# Altium PCB diapers.PcbDoc
Units mm, origin at the board's own origin, x right, y up, seen from the top; angles counter-clockwise.
Board outline 25.63 x 32.28 mm, 2 copper layers (Top Layer, Bottom Layer); 37 components, 22 nets, 124 pads, 35 vias.
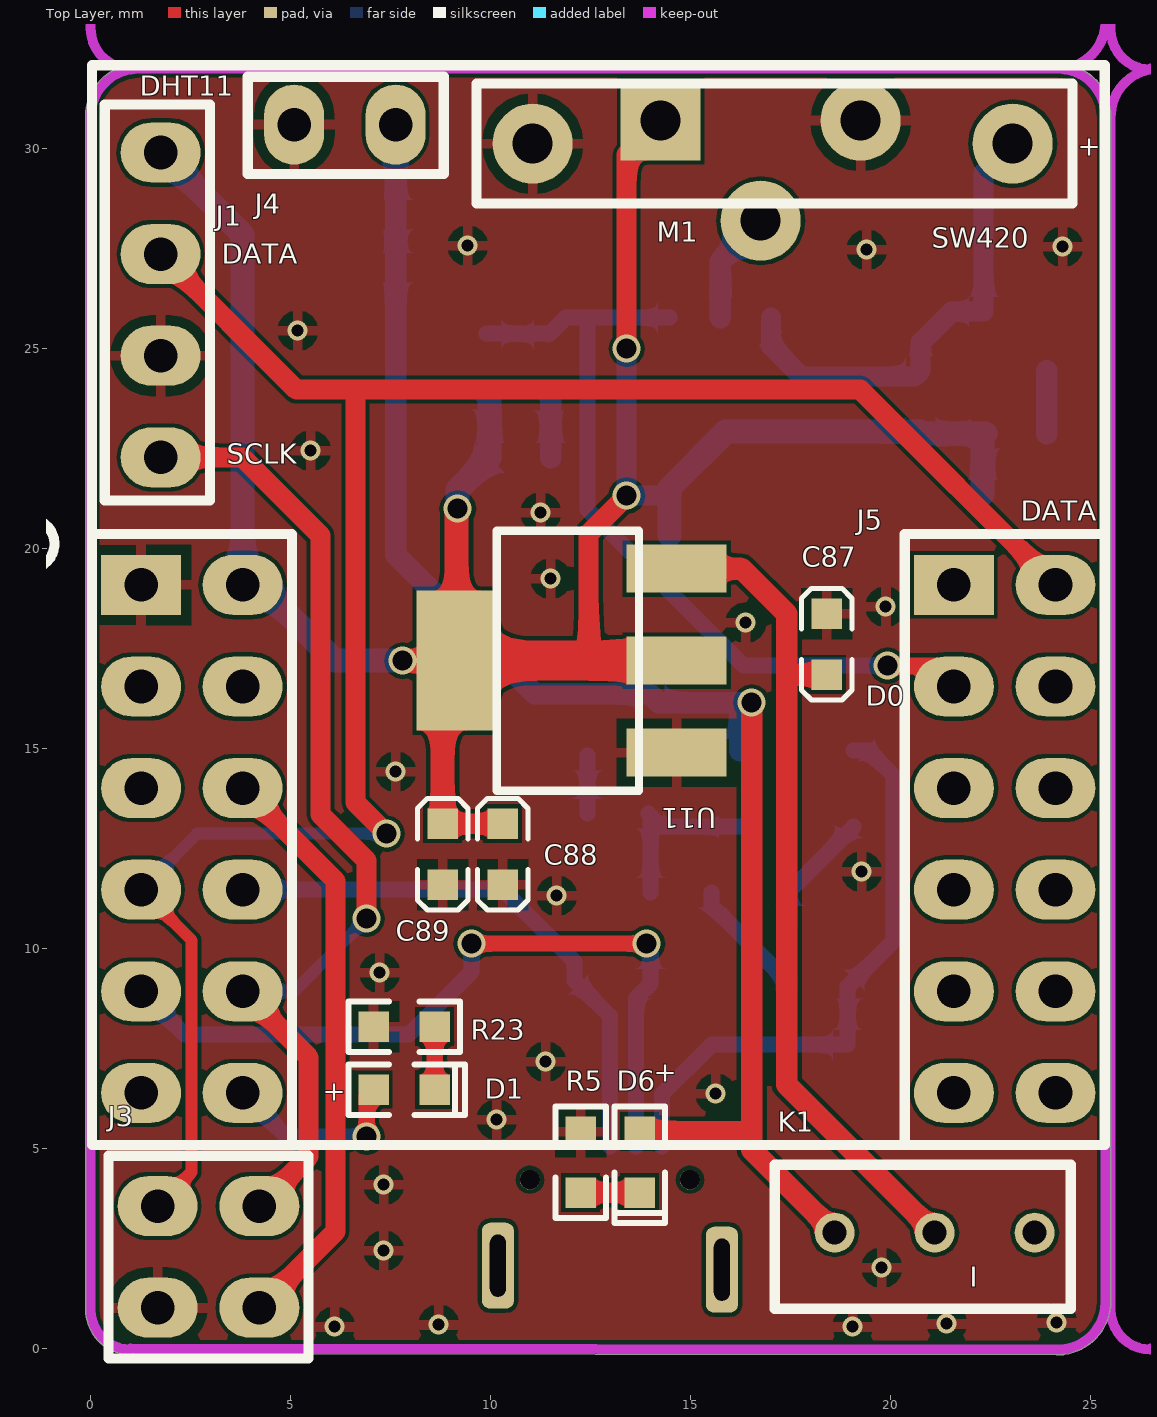
[diagram p0: Top Layer view]
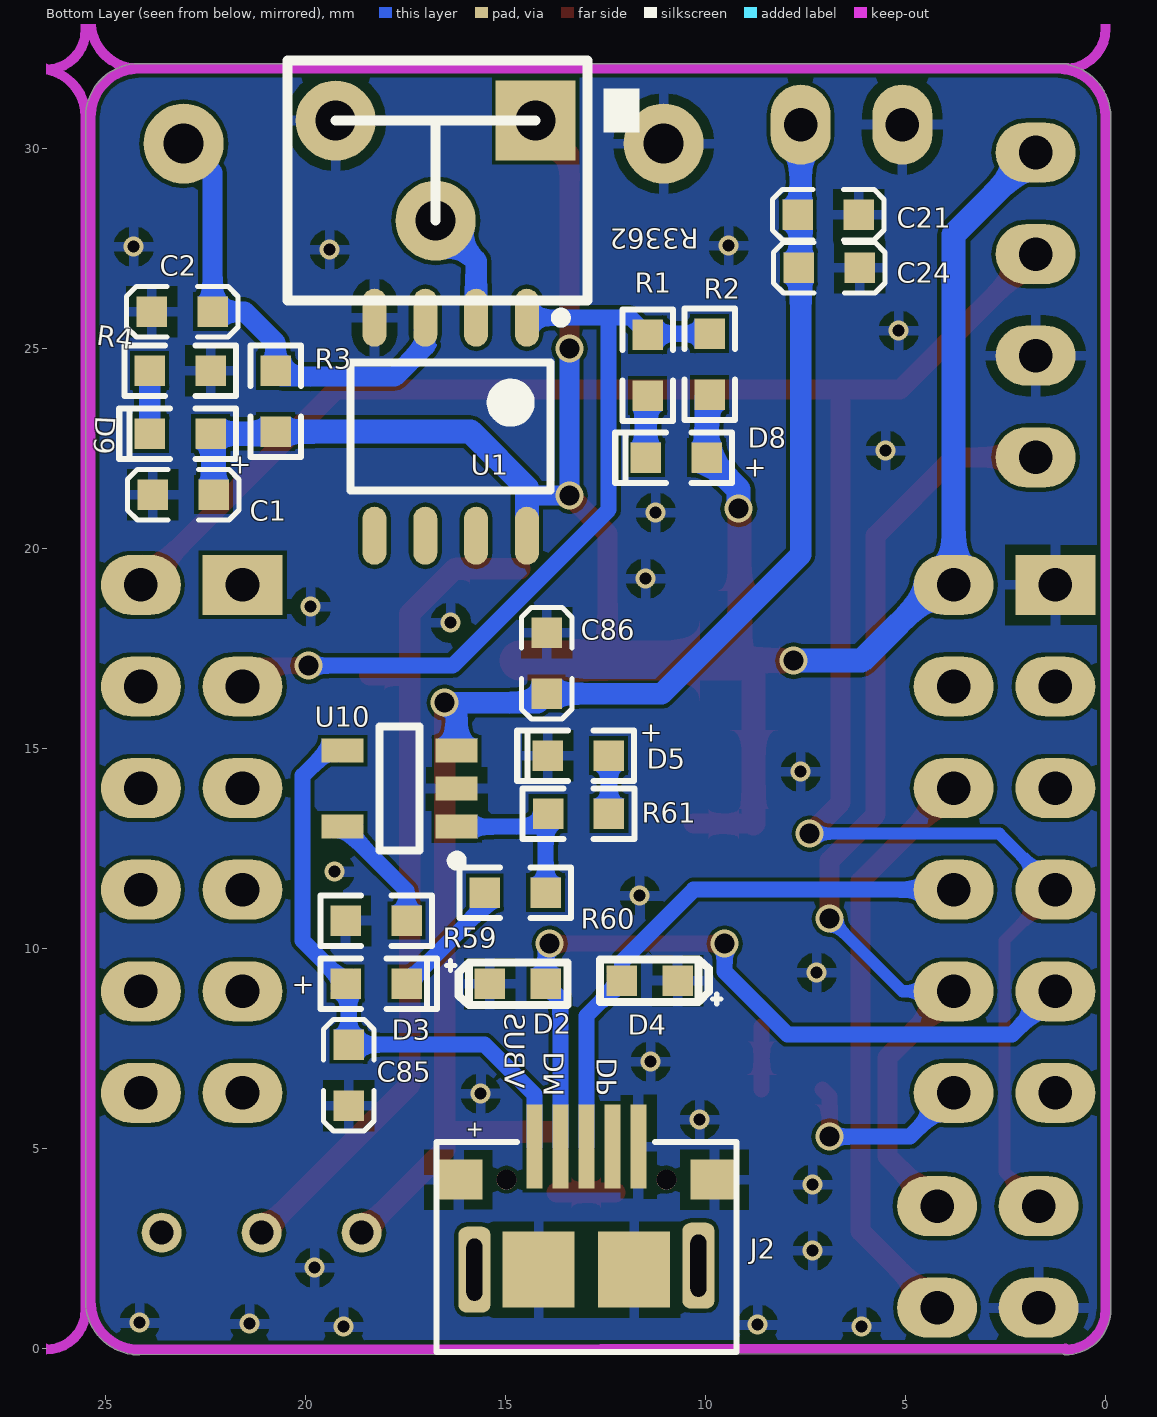
[diagram p1: Bottom Layer view, seen from below]
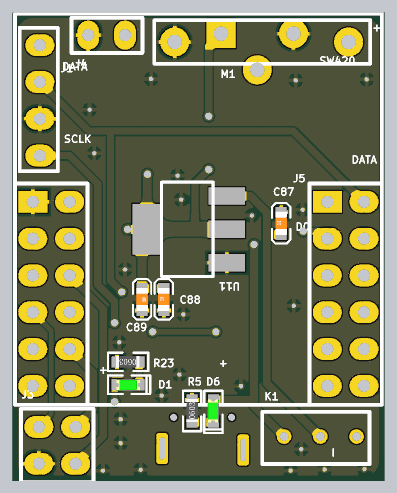
[diagram p2: 3D render of the assembled board from above, using the file's embedded part models]
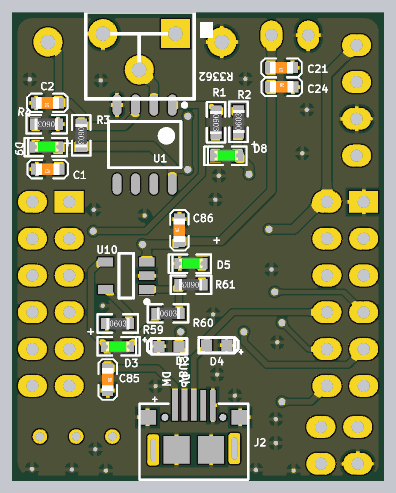
[diagram p3: 3D render of the assembled board from below, using the file's embedded part models]

## Layer stack, top to bottom
Top Solder: solder mask 0.0102, Solder Resist, Dk 3.5
Top Layer: signal copper 0.0356
Dielectric 1: dielectric 0.32, FR-4, Dk 4.8
Bottom Layer: signal copper 0.0356
Bottom Solder: solder mask 0.0102, Solder Resist, Dk 3.5

## Board outline
-0.125,0.975 ccw(c1,0.975) 1,-0.15 ccw(c1,-0.025) 1.075,-0.125 24.146,-0.147 ccw(c24.175,-0.025) 24.175,-0.15 ccw(c24.175,1.175) 24.268,-0.147 24.3,-0.147 ccw(c24.3,-0.022) 24.342,-0.14 ccw(c24.175,1.175) 25.5,1.175 25.5,30.775 ccw(c25.375,30.775) 25.5,30.788 25.5,30.787 ccw(c25.375,30.8) 25.5,30.8 ccw(c24.175,30.8) 24.175,32.125 1,32.125 ccw(c1,32) 0.918,32.095 ccw(c1.2,30.8) -0.125,30.8 -0.125,1 ccw(c0,1) -0.125,0.987 ccw(c0,0.975)

## Design rules (kind name [scope] priority, off if disabled: settings)
Clearance [All] p1: gap=0.1
PolygonConnect [All] p1: connectstyle=Relief reliefconductorwidth=0.254 reliefentries=4 polygonreliefangle="90 Angle" airgapwidth=0.254
RoutingVias [All] p1: holewidth=0.3 width=0.5 viastyle="Through Hole" minholewidth=0.3 minwidth=0.5 maxholewidth=0.5 maxwidth=0.7
SolderMaskExpansion [All] p1: expansion=0.102
Width [All] p1: maxlimit=10 minlimit=0.1 preferedwidth=0.5
30 further rules are at their usual default settings.

## Components (designator, comment, footprint, x,y, rotation, side; value= is the part's Value field where it differs from the comment)
C1 "104K50V" C0603 22.301,21.35 r0 bottom
C2 "104K50V" C0603 22.326,25.925 r0 bottom
C21 "104K50V" C0603 6.175,28.35 r0 bottom
C24 "106K50V" C0603 7.674,27.025 r180 bottom
C85 "475K16V" C0603 18.925,7.599 r270 bottom
C86 "106K50V" C0603 13.975,16.376 r90 bottom
C87 "104K50V" C0603 18.4,16.851 r90 top
C88 "106K50V" C0603 10.3,11.601 r90 top
C89 "104K50V" C0603 8.8,13.125 r270 top
D1 "LED0603G" D-LED0603G 7.075,6.475 r0 top
D2 "ESDA_TR1/0603" HS_0603D 14.698,9.125 r180 bottom
D3 "LED0603G" D-LED0603G 19,9.125 r180 bottom
D4 "ESDA_TR1/0603" HS_0603D 11.4,9.2 r0 bottom
D5 "LED0603G" D-LED0603G 12.425,14.825 r0 bottom
D6 "LED0603G" D-LED0603G 13.725,5.425 r270 top
D8 "LED0603G" D-LED0603G 9.975,22.275 r0 bottom
D9 "LED0603G" D-LED0603G 22.376,22.875 r0 bottom
J1 "J-D2.45-1*4" D2.54-1*4P 1.75,29.905 r270 top
J2 "USB-MINI-SOCKET" "MICRO-USB - 5.9" 14.281,5.05 r180 bottom
J3 "J-D2.54-2*2" D2.54-2*2P 1.675,1.025 r90 top
J4 "J-D2.54-1*2" D2.54-1*2P 7.625,30.6 r180 top
J5 "CC2540" CC2540 0.03,5.095 r0 top locked
K1 "SS-12D00" SS-12D00 23.6,2.9 r180 top
M1 "SW420" SW420 23.05,30.125 r180 top
R1 "1KF" R0603 11.45,25.349 r270 bottom
R2 "10KF" R0603 9.9,23.851 r90 bottom
R3 "10KF" R0603 20.75,24.449 r270 bottom
R4 "1KF" R0603 22.376,24.45 r0 bottom
R5 "1KF" R0603 12.25,3.901 r90 top
R23 "1KF" R0603 8.599,8.05 r180 top
R59 "R0603-15KF" R0603 18.999,10.7 r180 bottom
R60 "470RF" R0603 15.524,11.4 r180 bottom
R61 "470RF" R0603 12.418,13.375 r0 bottom
R3362 "10k" R3326P 12.95,32.2 r0 bottom
U1 "LM393-DR" LM393 16.375,23.05 r270 bottom
U10 "MCP73831" SOT23-5N 17.65,14 r0 bottom
U11 "AMS1117_3.3V" SOT-223 14.65,17.2 r90 top

## Footprints (in the part's own frame and the unit in brackets; to place one, negate y for a bottom-side part, rotate by r counter-clockwise, add the part's x,y. Pads: shape width x height; smd on the part's side, far side on the other; paste and mask are expansions set on the pad)
C0603 [mil]
  rect 30x30 smd: 1(0,0) 2(60,0)
  silkscreen extent -25,-25 85,25, body extent -1,-15 61,16, height 12
CC2540 [mm]
  rect 2x1.5 hole 0.838: 1(1.23,14) 13(21.55,14)
  oval 2x1.5 hole 0.838: 2(3.77,14) 3(1.23,11.46) 4(3.77,11.46) 5(1.23,8.92) 6(3.77,8.92) 7(1.23,6.38) 8(3.77,6.38) 9(1.23,3.84) 10(3.77,3.84) 11(1.23,1.3) 12(3.77,1.3) 14(24.09,14) 15(21.55,11.46) 16(24.09,11.46) 17(21.55,8.92) 18(24.09,8.92) 19(21.55,6.38) 20(24.09,6.38) 21(21.55,3.84) 22(24.09,3.84) 23(21.55,1.3) 24(24.09,1.3)
  silkscreen extent -2.19,0 25.32,26.99, body extent 0,0 25.4,15.27, height 10
D2.54-1*2P [mm]
  oval 1.5x2 hole 0.838: 1(0,0) 2(2.54,0)
  silkscreen extent -1.2,-1.2 3.7,1.23, body extent -1.1,-1.3 3.6,1.24, height 10
D2.54-1*4P [mm] "Bluetooth"
  oval 1.5x2 hole 0.838: 1(0,0) 2(2.54,0) 3(5.08,0) 4(7.62,0)
  silkscreen extent -1.2,-1.4 8.7,1.23, body extent -1.1,-1.4 8.7,1.23, height 10
D2.54-2*2P [mm] "DUAL_ROW_Pin_R2.54-5P"
  oval 1.5x2 hole 0.838: 1(0,0) 2(0,-2.54) 3(2.54,0) 4(2.54,-2.54)
  silkscreen extent -1.27,-3.77 3.8,1.23, body extent -1.27,-3.82 3.8,1.26, height 10
D-LED0603G [mil]
  rect 30x30 smd: 1(0,0) 2(60,0)
  silkscreen extent -25,-25 90,25, body extent -2,-16 62,15, height 24
HS_0603D [mil]
  rect 30x30 smd: 1(-27.5,0) 2(27.5,0)
  silkscreen extent -70,-21 49,23
LM393 [mm] "SOP, 8-Leads, Body 4.90x3.90mm, Pitch 1.27mm, IPC Medium Density"
  oval 1.45x0.6 smd: 1(-2.725,1.905) 2(-2.725,0.635) 3(-2.725,-0.635) 4(-2.725,-1.905) 5(2.725,-1.905) 6(2.725,-0.635) 7(2.725,0.635) 8(2.725,1.905)
  silkscreen extent -2.85,-2.5 1.6,2.88, body extent -2,-2.5 2,2.5, height 1.75
"MICRO-USB - 5.9" [mm]
  rrect50% 0.8x2.15 hole 0.4 slot 1.55 at 90 deg: 0(-1.5,-3.075) 0(4.1,-2.975)
  rect 0.4x2.1 smd: 1(0,0) 2(0.65,0) 3(1.3,0) 4(1.95,0) 5(2.6,0)
  rect 1.2x1 smd: 6(-1.9,-0.825) 7(4.5,-0.825)
  rect 1.8x1.9 smd: 8(0.106,-3.075) 9(2.493,-3.075)
  round 0.5 hole 0.5 unplated: ""(-0.7,-0.825) ""(3.3,-0.825)
  silkscreen extent -2.45,-5.13 5.05,0.12
R0603 [mil]
  rect 30x30 smd: 1(0,0) 2(60,0)
  silkscreen extent -25,-25 85,25, body extent 0,-16 62,15, height 18
R3326P [mm] "电位器精密可调电阻"
  rect 2x2 hole 1: 1(1.3,1.5)
  round 2 hole 1: 2(3.8,4) 3(6.3,1.5)
  silkscreen extent -1.3,0 7.5,6
SOT23-5N [mm] "SOT23, 5-Leads, Body 2.90x2.70mm, Pitch 0.95mm, IPC Medium Density"
  rect 1.05x0.6 smd: 1(-1.425,0.95) 2(-1.425,0) 3(-1.425,-0.95) 4(1.425,-0.95) 5(1.425,0.95)
  silkscreen extent -1.55,-1.55 0.5,1.92, body extent -0.9,-1.55 0.9,1.55, height 1.45
SOT-223 [mm]
  rect 1.2x2.5 smd: 1(-2.3,0) 2(0,0) 3(2.3,0)
  rect 3.5x2 smd: 2(0,5.5)
  silkscreen extent -3.25,0.94 3.25,4.5
SS-12D00 [mm] "SS-12D00(1P2T) 立式 柄高5MM"
  round 1 hole 0.6: 1(0,0) 2(2.5,0) 3(5,0)
  silkscreen extent -0.9,-1.7 6.5,1.9
SW420 [mm] "常闭型 振动开关SW-420 高灵敏震动开关2708全方位感应传感器"
  round 2 hole 1: 1(0,0) 2(12,0)
  silkscreen extent -1.5,-1.5 13.4,1.5

## Part data
C1 C2 C21 C87 C89: library part C0603X7R-104K50V, "贴片电容-陶瓷"
C24 C86 C88: library part C0603X7R-106K50V, "贴片电容-陶瓷"
C85: library part C0603X7R-475K16V, "贴片电容-陶瓷"
D1 D3 D5 D6 D8 D9: library part DLED-0603-G, "贴片二极管-LED"
D2 D4: library part "D Zener", "Zener Diode"
J1: library part J-D2.54-1*4单排排母
J2: library part J-USB-MINI-SOCKET, "USB-A卧式插座"
J3: library part J-D2.54-2*2双排, "双排排针-直针"
J4: library part J-D2.54-1*2单排
J5: "蓝牙主控模块的接口"
K1: library part "SS-12D00(1P2T) 立式 柄高5MM"
M1: "长闭震动开关"
R1 R4 R5 R23: library part R0603-1KF, "贴片电阻-通用"
R2 R3: library part R0603-10KF, "贴片电阻-通用"
R59: "贴片电容-通用"
R60 R61: library part R0603-470RF, "贴片电阻-通用"
R3362: library part R3362-10K, "电位器精密可调电阻"
U1: "双路比较器"
U10: "charge IC"
U11: library part AMS1117-3.3V

## Via types
v1: diameter 0.5, hole 0.3, Top Layer to Bottom Layer, tented both sides, 24 vias
v2: diameter 0.7, hole 0.5, Top Layer to Bottom Layer, tented both sides, 11 vias

## Nets (pads, with @x,y where several pads share a name; then routed paths per layer and width w, separated by ;. In a path a pad name is that pad's centre, name@x,y a point inside that pad or via, vN(x,y) a via of type N, cw(c..) or ccw(c..) an arc to the next point about the centre after c; other vN are vias at no path point)
+3.3V: C1.1 C88.2 C89.1 D8.1 D9.1 J1.1 J5.2 R2.1 R3.2 R3362.1 U1.8 U11.2 | length 62.7
  Top Layer w0.5: C89.1 C88.2 ; 12.45,17.2 12.45,20.375 v2(13.4,21.325) ; v2(13.4,25) 13.4,29.85 R3362.1
  Top Layer w0.6: v2(7.8,17.2) U11.2@9.15,17.2 ; C89.1 8.8,16.85 U11.2@9.15,17.2 ; v2(9.175,21) 9.15,20.975 U11.2@9.15,17.2
  Top Layer w1: U11.2@9.15,17.2 12.45,17.2 U11.2@14.65,17.2
  Bottom Layer w0.5: v2(13.4,25) v2(13.4,21.325) 14.275,21.325 14.47,21.52
  Bottom Layer w0.6: J1.1 3.8,27.855 J5.2 4.205,19.095 6.1,17.2 v2(7.8,17.2) ; v2(9.175,21) 9.175,21.475 D8.1 9.975,23.776 R2.1 ; U1.8 14.47,21.52 15.875,22.925 R3.2 20.8,22.875 D9.1 22.301,22.8 C1.1
BT2: C21.2 C24.1 C86.1 D6.1 J4.1 K1.3 U10.3 | length 39.4
  Top Layer w0.54: D6.1 16.525,5.425 ; v2(16.525,16.15) 16.525,5.425 ; K1.3 16.525,4.975 16.525,5.425
  Bottom Layer w0.54: J4.1 7.625,19.85 11.099,16.376 C86.1 14.201,16.15 v2(16.525,16.15) 16.225,15.85 U10.3
D0: J5.15 R1.1 R2.2 U1.1 | length 20.5
  Top Layer w0.4: v2(19.925,17.075) 21.06,17.075 J5.15
  Bottom Layer w0.4: R2.2 11.424,25.375 R1.1 11.876,25.775 12.425,25.775 ; U1.1 12.425,25.775 ; v2(19.925,17.075) 16.325,17.075 12.425,20.975 12.425,25.775
DGND: C1.2 C2.2 C21.1 C24.2 C85.2 C86.2 C87.2 C88.1 C89.2 D2.1 D4.1 D5.2 J1.3 J2.5 J2.6 J2.7 J2.8 J2.9 J3.1 J4.2 J5.1 M1.2 R4.1 R5.2 R23.2 R59.1 R3362.3 U1.4 U10.2 U11.1
  other v1: 6.1,0.55 19.05,0.55 8.7,0.6 21.4,0.625 24.15,0.65 19.775,2.025 7.325,2.45 7.325,4.1 10.15,5.725 15.625,6.375 11.375,7.175 7.225,9.4 11.65,11.325 19.275,11.925 7.625,14.425 16.375,18.15 19.875,18.55 11.5,19.25 11.25,20.9 5.5,22.45 5.175,25.45 19.4,27.475 24.3,27.55 9.425,27.575
DIN: J1.2 J3.3 J5.7 J5.14 | length 52.7
  Top Layer w0.3: J5.7 2.525,10.21 2.525,4.415 J3.3
  Top Layer w0.5: J1.2 5.14,23.975 6.625,23.975 ; v2(7.4,12.875) 6.625,13.65 6.625,23.975 ; J5.14 19.24,23.975 6.625,23.975
  Bottom Layer w0.3: J5.7 2.66,12.875 v2(7.4,12.875)
DM: D2.2 J2.2 J5.9 | length 19.7
  Top Layer w0.4: v2(9.525,10.125) v2(13.9,10.125)
  Bottom Layer w0.4: J5.9 2.345,7.85 7.95,7.85 9.525,9.425 v2(9.525,10.125) ; J2.2 13.631,8.756 D2.2 14,10.025 v2(13.9,10.125)
DOUT: J3.2 J5.6 | length 14.7
  Top Layer w0.5: J5.6 6.125,11.69 6.125,2.935 J3.2
DP: D4.2 J2.3 J5.8 | length 14
  Bottom Layer w0.4: J5.8 10.3,11.475 12.099,9.676 D4.2 12.981,8.318 J2.3
NetC2_1: C2.1 M1.1 R3.1 U1.3 | length 11.9
  Bottom Layer w0.5: U1.3 17.01,25.065 17.775,24.3 20.601,24.3 R3.1 20.75,25.15 21.525,25.925 C2.1 22.326,29.401 M1.1
NetD1_2: D1.2 R23.1 | length 1.6
  Top Layer w0.4: D1.2 R23.1
NetD3_2: D3.2 R60.1 | length 3.1
  Bottom Layer w0.4: R60.1 15.524,11.077 D3.2
NetD5_1: D5.1 R61.1 | length 1.5
  Bottom Layer w0.4: R61.1 12.418,14.818 D5.1
NetD6_2: D6.2 R5.1 | length 1.5
  Top Layer w0.5: R5.1 D6.2
NetD8_2: D8.2 R1.2 | length 1.6
  Bottom Layer w0.54: R1.2 11.499,23.776 D8.2
NetD9_2: D9.2 R4.2 | length 1.6
  Bottom Layer w0.54: D9.2 R4.2
NetR59_2: R59.2 U10.5 | length 3
  Bottom Layer w0.4: R59.2 17.475,11.45 U10.5
NetR60_2: R60.2 R61.2 U10.1 | length 4.3
  Bottom Layer w0.4: R61.2 R61.2@14,13.317 ; R60.2 R61.2@14,13.317 ; U10.1 14.267,13.05 R61.2@14,13.317
NetR3362_2: R3362.2 U1.2 | length 2.8
  Bottom Layer w0.54: U1.2 15.74,27.19 R3362.2
P13: D1.1 J5.12 | length 4.8
  Top Layer w0.4: v2(6.9,5.3) 6.9,6.3 D1.1
  Bottom Layer w0.4: J5.12 4.895,5.3 v2(6.9,5.3)
SCLK: J1.4 J3.4 J5.10 | length 25.3
  Top Layer w0.5: J1.4 3.79,22.285 5.75,20.325 5.75,13.35 6.9,12.2 v2(6.9,10.75) ; J5.10 5.45,7.285 5.45,4.8 J3.4
  Bottom Layer w0.3: J5.10 5.085,8.935 v2(6.9,10.75)
VBUS: C85.1 D3.1 J2.1 U10.4 | length 14.9
  Bottom Layer w0.4: J2.1 14.281,6.356 15.524,7.599 C85.1 18.925,9.05 D3.1 20.075,10.2 20.075,14.325 19.45,14.95 U10.4
VIN: C87.1 K1.2 U11.3 | length 21.3
  Top Layer w0.54: U11.3 16.276,19.5 17.401,18.375 17.401,16.775 ; C87.1 17.477,16.851 17.401,16.775 ; K1.2 17.401,6.599 17.401,16.775
pads on no net: J2. J2.0 J2.4 J5.3 J5.4 J5.5 J5.11 J5.13 J5.16 J5.17 J5.18 J5.19 J5.20 J5.21 J5.22 J5.23 J5.24 K1.1 U1.5 U1.6 U1.7

## Polygon pours and split planes (outlines as drawn)
DGND on Top Layer "gnd1" (solid, pour order 0): -0.125,31.975 -0.125,0 25.5,0 25.5,31.975
DGND on Bottom Layer "gnd" (solid, pour order 2): -0.125,31.975 -0.125,0 25.5,0 25.5,28.5 25.2,31.975

## Keep-outs
Keep-Out Layer:
  lines w0.25: 25.5,32.975 ccw(c26.5,32.975) 26.5,31.975 ; 25.5,33 25.5,62.8 cw(c26.7,62.8) 26.7,64 ; 25.5,64.975 ccw(c26.5,64.975) 26.5,63.975 ; 25.5,65 25.5,94.8 cw(c26.7,94.8) 26.7,96 ; 26.5,96 49.675,96 cw(c49.675,94.8) 50.875,94.8 ; 49.675,31.975 ccw(c49.675,33.175) 50.875,33.175 50.875,62.775 ; 49.675,63.975 ccw(c49.675,65.175) 50.875,65.175 50.875,94.775 ; 49.8,31.978 26.5,32 ; 49.8,63.978 26.5,64 49.675,64 cw(c49.675,62.8) 50.875,62.8 ; 51,32.975 ccw(c52,32.975) 52,31.975 ; 51,33 51,62.8 cw(c52.2,62.8) 52.2,64 ; 51,64.975 ccw(c52,64.975) 52,63.975 ; 51,65 51,94.8 cw(c52.2,94.8) 52.2,96 ; 52,96 75.175,96 cw(c75.175,94.8) 76.375,94.8 ; 75.175,31.975 ccw(c75.175,33.175) 76.375,33.175 76.375,62.775 ; 75.175,63.975 ccw(c75.175,65.175) 76.375,65.175 76.375,94.775 ; 75.3,31.978 52,32 ; 75.3,63.978 52,64 75.175,64 cw(c75.175,62.8) 76.375,62.8 ; 0,0.975 ccw(c1,0.975) 1,-0.025 ; 0,0.975 ccw(c1,0.975) 1,-0.025 ; 0,0.975 ccw(c1,0.975) 1,-0.025 ; 0,0.975 ccw(c1,0.975) 1,-0.025 ; 0,1 0,30.8 ; 0,1 0,30.8 ; 0,1 0,30.8 ; 0,1 0,30.8 ; 0,30.8 cw(c1.2,30.8) 1.2,32 ; 0,30.8 cw(c1.2,30.8) 1.2,32 ; 0,30.8 cw(c1.2,30.8) 1.2,32 ; 0,30.8 cw(c1.2,30.8) 1.2,32 ; 0,33 ccw(c1,33) 1,32 ; 0,33 0,62.8 ; 0,33 0,62.8 ; 0,62.8 cw(c1.2,62.8) 1.2,64 ccw(c1.2,62.8) 0,62.8 ; 0,94.8 cw(c1.2,94.8) 1.2,96 ccw(c1.2,94.8) 0,94.8 ; 0,94.8 0,65 0,94.8 ; 1,0 24.3,-0.022 ; 1,0 24.3,-0.022 ; 1,0 24.3,-0.022 ; 1,0 24.3,-0.022 ; 1,32 24.175,32 ; 1,32 24.175,32 ; 1,32 24.175,32 ; 1,32 24.175,32 ; 1,64 24.175,64 ; 1,64 24.175,64 ; 1,64 24.3,63.978 1,64 ; 24.175,-0.025 ccw(c24.175,1.175) 25.375,1.175 ; 24.175,-0.025 ccw(c24.175,1.175) 25.375,1.175 ; 24.175,-0.025 ccw(c24.175,1.175) 25.375,1.175 ; 24.175,-0.025 ccw(c24.175,1.175) 25.375,1.175 ; 24.175,32 cw(c24.175,30.8) 25.375,30.8 ; 24.175,32 cw(c24.175,30.8) 25.375,30.8 ; 24.175,32 cw(c24.175,30.8) 25.375,30.8 ; 24.175,32 cw(c24.175,30.8) 25.375,30.8 ; 24.175,32 ccw(c24.188,33.187) 25.375,33.175 ; 24.175,64 cw(c24.175,62.8) 25.375,62.8 ccw(c24.175,62.8) 24.175,64 ; 24.175,96 cw(c24.175,94.8) 25.375,94.8 ccw(c24.175,94.8) 24.175,96 ; 24.175,96 1,96 24.175,96 ; 25.375,1.175 25.375,30.775 ; 25.375,1.175 25.375,30.775 ; 25.375,1.175 25.375,30.775 ; 25.375,1.175 25.375,30.775 ; 25.375,33.175 25.375,62.775 25.375,33.175 ; 25.375,65.175 cw(c24.175,65.175) 24.175,63.975 ccw(c24.175,65.175) 25.375,65.175 ; 25.375,65.175 25.375,94.775 25.375,65.175 ; 25.5,30.8 cw(c26.7,30.8) 26.7,32 ccw(c26.7,30.8) 25.5,30.8 ; 25.5,30.8 25.5,1 25.5,30.8 ; 26.5,32 49.675,32 ; 26.5,32 49.675,32 ; 49.675,32 cw(c49.675,30.8) 50.875,30.8 ccw(c49.675,30.8) 49.675,32 ; 50.875,1.175 cw(c49.675,1.175) 49.675,-0.025 ccw(c49.675,1.175) 50.875,1.175 ; 50.875,1.175 50.875,30.775 50.875,1.175 ; 51,30.8 cw(c52.2,30.8) 52.2,32 ccw(c52.2,30.8) 51,30.8 ; 51,30.8 51,1 51,30.8 ; 52,32 75.175,32 ; 52,32 75.175,32 ; 75.175,32 cw(c75.175,30.8) 76.375,30.8 ccw(c75.175,30.8) 75.175,32 ; 76.375,1.175 cw(c75.175,1.175) 75.175,-0.025 ccw(c75.175,1.175) 76.375,1.175 ; 76.375,1.175 76.375,30.775 76.375,1.175 ; 0,64.975 ccw(c1,64.975) 1,63.975 cw(c1,64.975) 0,64.975 ; 25.5,0.975 ccw(c26.5,0.975) 26.5,-0.025 cw(c26.5,0.975) 25.5,0.975 ; 26.5,0 49.8,-0.022 26.5,0 ; 51,0.975 ccw(c52,0.975) 52,-0.025 cw(c52,0.975) 51,0.975 ; 52,0 75.3,-0.022 52,0

## Silkscreen, mask and mechanical layers (free items; w line width, h text height)
Top Overlay:
  text "DHT11" at 1.225,31.325 h0.5
  text "+" at 24.675,29.825 h0.5
  text "SW420" at 21.025,27.525 h0.5
  text "DATA" at 3.275,27.125 h0.5
  text "SCLK" at 3.4,22.125 h0.5
  text "DATA" at 23.25,20.7 h0.5
  text "D0" at 19.375,16.075 h0.5
  text "+" at 14.075,6.675 h0.5
  text "+" at 5.8,6.2 h0.5
Bottom Overlay:
  text "+" at 21.35,21.875 h0.5
  text "+" at 8.475,21.8 h0.5
  text "+" at 11.075,15.175 h0.5
  text "+" at 19.775,8.875 h0.5
  text "DM" at 13.55,7.425 h0.5 r270
  text "DP" at 12.225,7.275 h0.5 r270
  text "VBUS" at 15.025,6.5 h0.5 r90

## Dimensions
1,0 to 1.2,32 on Keep-Out Layer
0,1 to 25.375,1.175 on Keep-Out Layer
0,1 to 25.375,1.175 on Keep-Out Layer
1,0 to 1.2,32 on Keep-Out Layer
1,0 to 1.2,32 on Keep-Out Layer
0,1 to 25.375,1.175 on Keep-Out Layer
0,1 to 25.375,1.175 on Keep-Out Layer
1,0 to 1.2,32 on Keep-Out Layer

## Text inside footprints (layer, text, board x,y; h text height)
J2: Bottom Overlay "+" at 15.994,5.302 h0.4
K1: Top Overlay "I" at 22.175,2.05 h0.5 r180